# Altium PCB 400ETBV4.PcbDoc (part 1 of 2)
Units mm, origin at the board's own origin, x right, y up, seen from the top; angles counter-clockwise.
Board outline 52.77 x 58.36 mm, 2 copper layers (Top Layer, Bottom Layer), stack 1.651 mm thick; 65 components, 61 nets, 261 pads, 245 vias.
Unrouted connection lines stored in the file: 16.
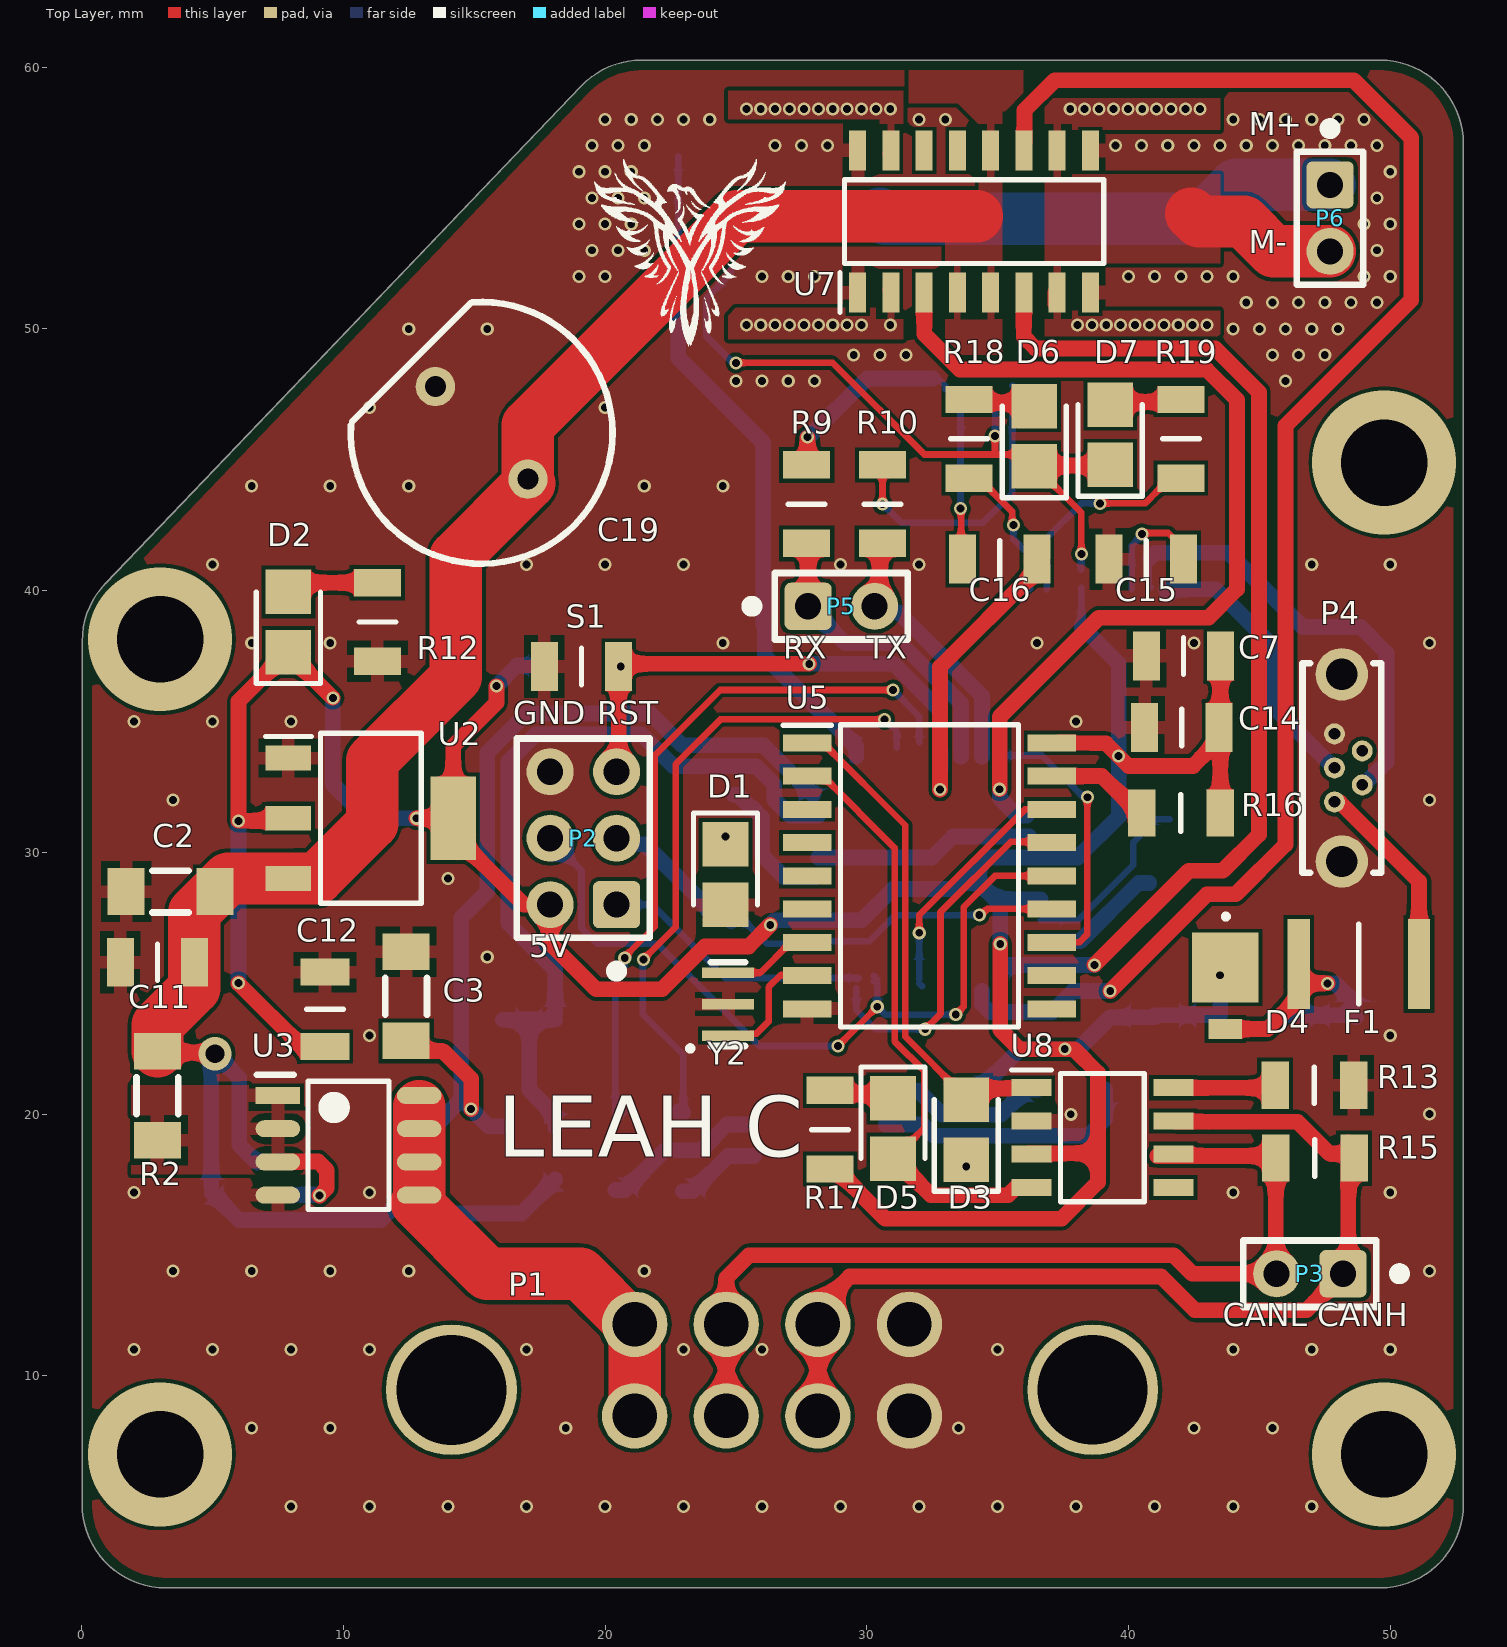
[diagram p0: Top Layer view]
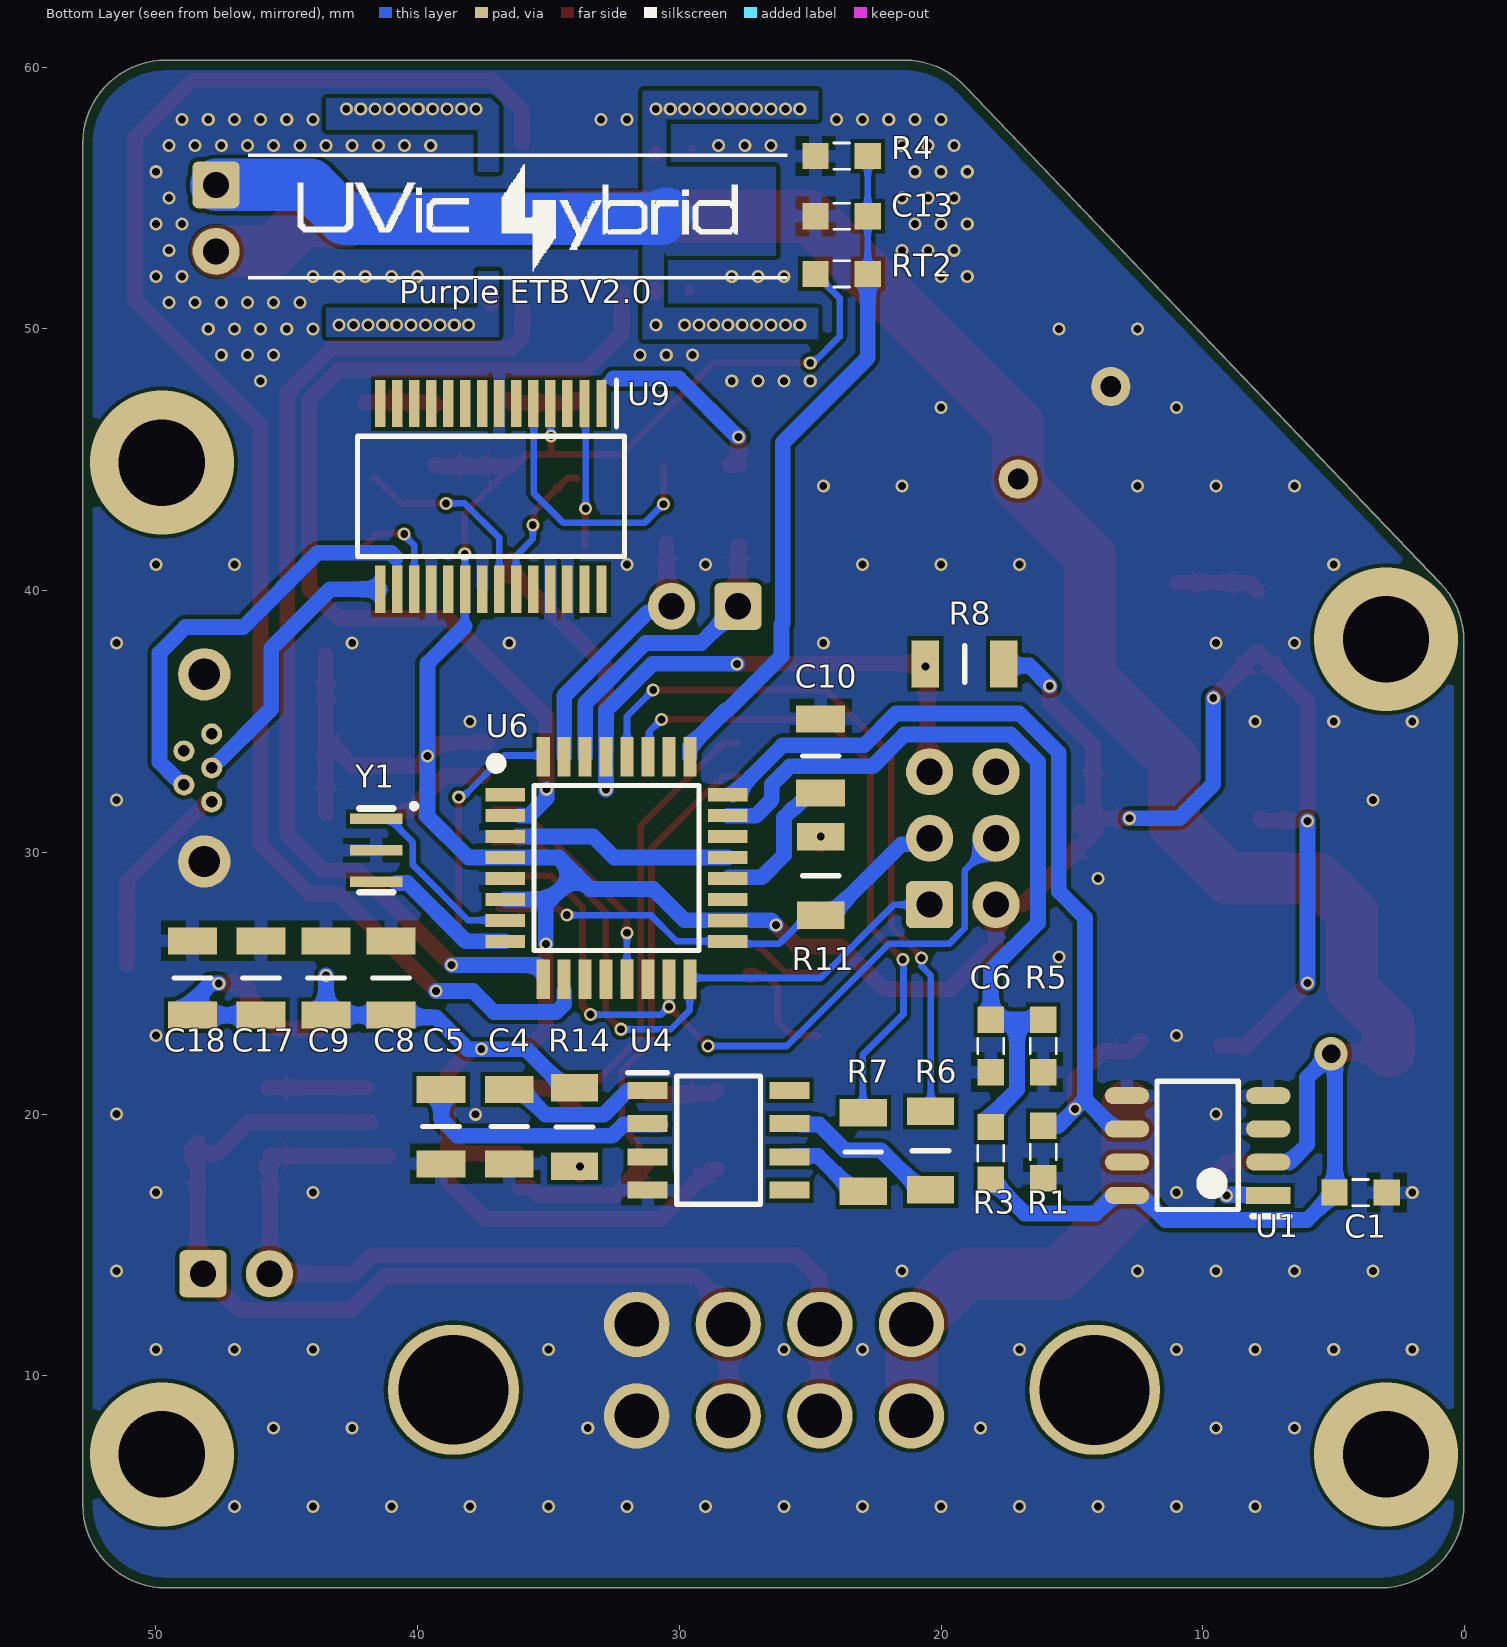
[diagram p1: Bottom Layer view, seen from below]

## Layer stack, top to bottom
Top Solder: solder mask 0.0102, Solder Resist, Dk 3.5
Top Layer: signal copper 0.0254
Dielectric 1: dielectric 1.6, FR-4, Dk 4.8
Bottom Layer: signal copper 0.0254
Bottom Solder: solder mask 0.0102, Solder Resist, Dk 3.5

## Board outline
3.205,1.9 cw(c3.205,5.08) 0.025,5.08 0.025,38.066 cw(c3.205,38.066) 0.907,40.264 19.093,59.281 cw(c21.391,57.083) 21.391,60.263 49.616,60.263 cw(c49.616,57.083) 52.796,57.083 52.796,5.08 cw(c49.616,5.08) 49.616,1.9
cut-out: 3.2,1.9

## Design rules (kind name [scope] priority, off if disabled: settings)
BoardOutlineClearance [All] p1: gap=0.381 ignorepadtopadclearanceinfootprint=FALSE except(0: Arc-SplitContinuation Track-SplitContinuation SMDPad-SplitContinuation THPad-SplitContinuation Via-SplitContinuation Fill-SplitContinuation Poly-SplitContinuation Region-SplitContinuation Text-SplitContinuation)
Clearance [All] p1: gap=0.15 ignorepadtopadclearanceinfootprint=FALSE
HoleSize [All] p1: absolutevalues=TRUE maxlimit=5 minlimit=0.3 maxpercent=80.000 minpercent=20.000
HoleToHoleClearance [All] p1: gap=0.2 allowstackedmicrovias=TRUE
MinimumAnnularRing [All] p1: minimumring=0.1
MinimumSolderMaskSliver [All] p1: minsoldermaskwidth=0.05
PolygonConnect PolygonConnect_2 [InNet('+12V')] p1: thpad.connectstyle=Relief thpad.reliefconductorwidth=0.254 thpad.reliefentries=4 thpad.polygonreliefangle="90 Angle" thpad.airgapwidth=0.254 smdpad.connectstyle=Relief smdpad.reliefconductorwidth=0.254 smdpad.reliefentries=4 smdpad.polygonreliefangle="90 Angle" smdpad.airgapwidth=0.254 via.connectstyle=Direct via.reliefconductorwidth=0.254 via.reliefentries=4 via.polygonreliefangle="90 Angle" via.airgapwidth=0.254
PolygonConnect PolygonConnect_4 [InNet('OUT_A')] p2: thpad.connectstyle=Relief thpad.reliefconductorwidth=0.254 thpad.reliefentries=4 thpad.polygonreliefangle="90 Angle" thpad.airgapwidth=0.254 smdpad.connectstyle=Relief smdpad.reliefconductorwidth=0.254 smdpad.reliefentries=4 smdpad.polygonreliefangle="90 Angle" smdpad.airgapwidth=0.254 via.connectstyle=Direct via.reliefconductorwidth=0.254 via.reliefentries=4 via.polygonreliefangle="90 Angle" via.airgapwidth=0.254
PolygonConnect PolygonConnect_3 [InNet('OUT_B')] p3: thpad.connectstyle=Relief thpad.reliefconductorwidth=0.254 thpad.reliefentries=4 thpad.polygonreliefangle="90 Angle" thpad.airgapwidth=0.254 smdpad.connectstyle=Relief smdpad.reliefconductorwidth=0.254 smdpad.reliefentries=4 smdpad.polygonreliefangle="90 Angle" smdpad.airgapwidth=0.254 via.connectstyle=Direct via.reliefconductorwidth=0.254 via.reliefentries=4 via.polygonreliefangle="90 Angle" via.airgapwidth=0.254
PolygonConnect [InNet('GND') And OnLayer('Multi-Layer')] p4: connectstyle=Direct reliefconductorwidth=0.5 reliefentries=4 polygonreliefangle="90 Angle" airgapwidth=0.254
PolygonConnect PolygonConnect_1 [All] p5: connectstyle=Relief reliefconductorwidth=0.5 reliefentries=4 polygonreliefangle="90 Angle" airgapwidth=0.254
RoutingVias [All] p1: holewidth=0.5 width=1 viastyle="Through Hole" minholewidth=0.5 minwidth=1 maxholewidth=0.5 maxwidth=1
SilkToSilkClearance [All] p1: silktosilkclearance=0.1
SolderMaskExpansion [All] p1: expansion=0.04
Width [All] p1: maxlimit=2 minlimit=0.254 preferedwidth=0.6
26 further rules are at their usual default settings.

## Classes and differential pairs
component class Candunio: C7 C8 C9 C10 C11 C12 C14 C15 C16 C17 C18 D1 D2 D3 D4 D5 D6 D7 F1 P2 P3 P4 P5 R8 R9 R10 R11 R12 R13 R14 R15 R16 R17 R18 R19 S1 U2 U5 U6 U8 U9 Y1 Y2
component class 400ETB: C1 C2 C3 C4 C5 C6 C13 C19 P1 P6 R1 R2 R3 R4 R5 R6 R7 RT2 U1 U3 U4 U7

## Components (designator, comment, footprint, x,y, rotation, side; value= is the part's Value field where it differs from the comment)
C1 "0.1uF" C0603 3.971,17 r0 bottom value=100pF
C2 "22uF" C1206 3.4,28.5 r0 top value=100pF
C3 "22uF" C1206 12.4,24.5 r270 top value=100pF
C4 "4.7uF" CAPC3216X170N 36.5,19.52 r90 bottom
C5 "4.7uF" CAPC3216X170N 39.1,19.52 r90 bottom
C6 "0.1uF" C0603 18.1,22.6 r90 bottom value=100pF
C7 "4.7uF" CAPC3216X170N 42.1,37.5 r0 top
C8 "4.7uF" CAPC3216X170N 41.016,25.2 r90 bottom
C9 "4.7uF" CAPC3216X170N 43.5,25.2 r270 bottom
C10 "4.7uF" CAPC3216X170N 24.6,33.68 r270 bottom
C11 "4.7uF" CAPC3216X170N 2.9,25.8 r0 top
C12 "4.7uF" CAPC3216X170N 9.3,24 r270 top
C13 "0.1uF" C0603 23.8,54.3 r180 bottom value=100pF
C14 "4.7uF" CAPC3216X170N 42.037,34.773 r0 top
C15 "4.7uF" CAPC3216X170N 40.68,41.2 r0 top
C16 "4.7uF" CAPC3216X170N 35.08,41.2 r0 top
C17 "4.7uF" CAPC3216X170N 45.984,25.2 r270 bottom
C18 "4.7uF" CAPC3216X170N 48.6,25.2 r270 bottom
C19 "470uF" "CAP THRU 10MM" 15.286,46.025 r135 top value=100pF
D1 "Red" LEDC3216X120NRED 24.6,29.15 r270 top
D2 "Green" LEDC3216X120NGRN 7.9,38.8 r90 top
D3 "Yellow" LEDC3216X120NYEL 33.8,19.4 r90 top
D4 "Diode" DO-220AA 43.7,24.901 r270 top
D5 "Yellow" LEDC3216X120NYEL 31,19.45 r270 top
D6 "Yellow" LEDC3216X120NYEL 36.4,45.9 r90 top
D7 "Yellow" LEDC3216X120NYEL 39.3,45.95 r90 top
F1 "Fuse 2" FUSC4632X85N 48.8,25.73 r0 top
P1 "Molex MX150 8P" "MX150 8-Pin" 14.131,9.465 r0 top locked
P2 "ICSP" "Pin Header 2x3 TH Pitch 2.54mm" 17.9,28 r90 top
P3 "CANOUT" "Pin Header 1x2 TH Pitch 2.54mm" 48.2,13.9 r180 top
P4 "USB_MICRO_B" "USB MICRO B THRU" 48.15,33.225 r90 top
P5 "CANOUT" "Pin Header 1x2 TH Pitch 2.54mm" 27.76,39.4 r0 top
P6 "CANOUT" "Pin Header 1x2 TH Pitch 2.54mm" 47.7,55.5 r270 top
R1 "3K3" R0603 16.1,18.55 r90 bottom value=1K
R2 "0R05" R1206 2.9,20.7 r90 top value=1K
R3 "10K0" R0603 18.1,18.5 r270 bottom value=1K
R4 "5K0" R0603 23.8,56.6 r180 bottom value=10K
R5 "3K3" R0603 16.1,22.6 r90 bottom value=1K
R6 "10K" RESC3216X60N 20.4,18.6 r90 bottom
R7 "10K" RESC3216X60N 22.975,18.55 r90 bottom
R8 "10K" RESC3216X60N 19.1,37.2 r0 bottom
R9 "10K" RESC3216X60N 27.7,43.3 r90 top
R10 "10K" RESC3216X60N 30.6,43.3 r90 top
R11 "10K" RESC3216X60N 24.6,29.1 r270 bottom
R12 "10K" RESC3216X60N 11.3,38.8 r270 top
R13 "10K" RESC3216X60N 47.1,21.1 r180 top
R14 "10K" RESC3216X60N 34,19.5 r270 bottom
R15 "10K" RESC3216X60N 47.117,18.313 r180 top
R16 "10K" RESC3216X60N 42,31.5 r0 top
R17 "10K" RESC3216X60N 28.6,19.4 r270 top
R18 "10K" RESC3216X60N 33.9,45.8 r90 top
R19 "10K" RESC3216X60N 42,45.8 r90 top
RT2 "NCP18XH103F03RB" R0603 23.8,52.1 r180 bottom
S1 "SW-PB" SMDswitch_1206 19.1,37.1 r180 top
U1 "MAX4172" SOIC-8 10.2,18.8 r0 bottom
U2 "LM1117IMPX-5.0" SOT230P700X180-4N 11.05,31.3 r0 top
U3 "DMG4435SSS" SOIC-8 10.2,18.8 r0 top
U4 "AS5601-ASOM" SOIC127P600X175-8N 28.5,19 r180 bottom locked
U5 "MCP2515-E/ST" SOIC127P1030X265-18N 32.4,29.1 r0 top
U6 "ATmega328P-AU" QFP80P900X900X120-32N 32.4,29.4 r180 bottom
U7 "VNH7070ASTR" SOIC127P600X175-16N 34.1,54.1 r90 top
U8 "MCP2551-E/SN" SOIC127P600X175-8N 39,19.1 r0 top
U9 "FT232RL-Reel" SOP65P780X200-28N 37.2,43.6 r270 bottom
Y1 "CSTCE16M0V53-R0" CSTCE_G 41.58,30.074 r90 bottom
Y2 "CSTCE16M0V53-R0" CSTCE_G 24.7,24.2 r270 top

## Footprints (in the part's own frame and the unit in brackets; to place one, negate y for a bottom-side part, rotate by r counter-clockwise, add the part's x,y. Pads: shape width x height; smd on the part's side, far side on the other; paste and mask are expansions set on the pad)
C0603 [mm]
  rect 1x1 smd: 1(-1,0) 2(1,0)
  silkscreen extent -0.3,-0.5 0.3,0.5, body extent -0.8,-0.4 0.8,0.4, height 0.4
C1206 [mm]
  rect 1.4x1.8 smd: 1(-1.7,0) 2(1.7,0)
  silkscreen extent -0.7,-0.8 0.7,0.8, body extent -1.5,-0.8 1.5,0.8, height 0.6
"CAP THRU 10MM" [mm]
  round 1.5 hole 0.8: 1(-2.5,0) 2(2.5,0)
  silkscreen extent -5,-5 3.8,5, body extent -5,-5 5,5.1, height 10
CAPC3216X170N [mm]
  rect 1.03x1.87 smd: 1(-1.42,0) 2(1.42,0)
  silkscreen extent 0,-0.7 0,0.7, body extent -1.6,-0.8 1.6,0.8, height 1.7
CSTCE_G [mm]
  rect 0.4x2 smd: 1(1.2,0) 2(0,0) 3(-1.2,0)
  silkscreen extent -1.6,-1.52 1.77,0.65, body extent -1.6,-0.65 1.6,0.65, height 0.7
DO-220AA [mil]
  rect 30x50 smd: 1(65.06,0)
  rect 105.12x100 smd: 2(-27.5,0)
  silkscreen extent -107,-2 -102,3, body extent -76,-40 76,40, height 39
FUSC4632X85N [mm]
  rect 0.85x3.43 smd: 1(-2.3,0) 2(2.3,0)
  silkscreen extent 0,-1.52 0,1.52, body extent -2.54,-3.2 2.54,1.65, height 0.54
LEDC3216X120NGRN [mm]
  rect 1.7x1.75 smd: 1(-1.15,0) 2(1.15,0)
  silkscreen extent -2.35,-1.22 1.15,1.22, body extent -1.6,-0.8 1.6,0.8, height 1.1
LEDC3216X120NRED [mm]
  rect 1.7x1.75 smd: 1(-1.15,0) 2(1.15,0)
  silkscreen extent -2.35,-1.22 1.15,1.22, body extent -1.6,-0.8 1.6,0.8, height 1.1
LEDC3216X120NYEL [mm]
  rect 1.7x1.75 smd: 1(-1.15,0) 2(1.15,0)
  silkscreen extent -2.35,-1.22 1.15,1.22, body extent -1.6,-0.8 1.6,0.8, height 1.1
"MX150 8-Pin" [mm]
  round 2.5 hole 1.7: 1(7,2.5) 2(10.5,2.5) 3(14,2.5) 4(17.5,2.5) 5(7,-1) 6(10.5,-1) 7(14,-1) 8(17.5,-1)
  round 5 hole 4.2 mask+0.102: 24(0,0) 24(24.5,0)
"Pin Header 1x2 TH Pitch 2.54mm" [mm]
  rrect25% 1.8x1.8 hole 1: 1(0,0)
  round 1.8 hole 1: 2(2.54,0)
  silkscreen extent -2.3,-1.27 3.81,1.27, body extent -1.27,-1.27 3.81,1.27, height 9.5
"Pin Header 2x3 TH Pitch 2.54mm" [mm]
  rrect25% 1.8x1.8 hole 1: 1(0,-2.54)
  round 1.8 hole 1: 2(2.54,-2.54) 3(5.08,-2.54) 4(0,0) 5(2.54,0) 6(5.08,0)
  silkscreen extent -2.69,-3.81 6.35,1.27, body extent -1.27,-3.81 6.35,1.27, height 9.5
QFP80P900X900X120-32N [mm]
  rect 1.5x0.5 smd: 1(-4.25,2.8) 2(-4.25,2) 3(-4.25,1.2) 4(-4.25,0.4) 5(-4.25,-0.4) 6(-4.25,-1.2) 7(-4.25,-2) 8(-4.25,-2.8) 17(4.25,-2.8) 18(4.25,-2) 19(4.25,-1.2) 20(4.25,-0.4) 21(4.25,0.4) 22(4.25,1.2) 23(4.25,2) 24(4.25,2.8)
  rect 0.5x1.5 smd: 9(-2.8,-4.25) 10(-2,-4.25) 11(-1.2,-4.25) 12(-0.4,-4.25) 13(0.4,-4.25) 14(1.2,-4.25) 15(2,-4.25) 16(2.8,-4.25) 25(2.8,4.25) 26(2,4.25) 27(1.2,4.25) 28(0.4,4.25) 29(-0.4,4.25) 30(-1.2,4.25) 31(-2,4.25) 32(-2.8,4.25)
  silkscreen extent -4.8,-3.15 3.15,4.2, body extent -4.5,-4.5 4.5,4.5, height 1.2
R0603 [mm]
  rect 1x1 smd: 1(-1,0) 2(1,0)
  silkscreen extent -0.3,-0.5 0.3,0.5, body extent -0.8,-0.4 0.8,0.4, height 0.4
R1206 [mm]
  rect 1.4x1.8 smd: 1(-1.7,0) 2(1.7,0)
  silkscreen extent -0.7,-0.8 0.7,0.8, body extent -1.5,-0.8 1.5,0.8, height 0.6
RESC3216X60N [mm]
  rect 1.05x1.8 smd: 1(-1.5,0) 2(1.5,0)
  silkscreen extent 0,-0.7 0,0.7, body extent -1.57,-0.83 1.58,0.77, height 1.2
SMDswitch_1206 [mm]
  rect 1.03x1.87 smd: 1(-1.42,0) 2(1.42,0)
  silkscreen extent 0,-0.7 0,0.7, body extent -1.53,-0.81 1.53,0.81, height 0.46
SOIC127P600X175-8N [mm]
  rect 1.525x0.65 smd: 1(-2.712,1.905) 2(-2.712,0.635) 3(-2.712,-0.635) 4(-2.712,-1.905) 5(2.712,-1.905) 6(2.712,-0.635) 7(2.712,0.635) 8(2.712,1.905)
  silkscreen extent -3.47,-2.45 1.6,2.58, body extent -3,-2.45 3,2.45, height 1.75
SOIC127P600X175-16N [mm]
  rect 1.525x0.65 smd: 1(-2.712,4.445) 2(-2.712,3.175) 3(-2.712,1.905) 4(-2.712,0.635) 5(-2.712,-0.635) 6(-2.712,-1.905) 7(-2.712,-3.175) 8(-2.712,-4.445) 9(2.712,-4.445) 10(2.712,-3.175) 11(2.712,-1.905) 12(2.712,-0.635) 13(2.712,0.635) 14(2.712,1.905) 15(2.712,3.175) 16(2.712,4.445)
  silkscreen extent -3.47,-4.95 1.6,5.12, body extent -3,-4.95 3,4.95, height 1.75
SOIC127P1030X265-18N [mm]
  rect 1.85x0.65 smd: 1(-4.675,5.08) 2(-4.675,3.81) 3(-4.675,2.54) 4(-4.675,1.27) 5(-4.675,0) 6(-4.675,-1.27) 7(-4.675,-2.54) 8(-4.675,-3.81) 9(-4.675,-5.08) 10(4.675,-5.08) 11(4.675,-3.81) 12(4.675,-2.54) 13(4.675,-1.27) 14(4.675,0) 15(4.675,1.27) 16(4.675,2.54) 17(4.675,3.81) 18(4.675,5.08)
  silkscreen extent -5.6,-5.77 3.4,5.77, body extent -5.15,-5.77 5.15,5.78, height 2.65
SOIC-8 [mm] "SOIC, 8-Leads, Body 4.90x3.90mm, Pitch 1.27mm, IPC Low Density"
  rect 1.7x0.65 smd: 1(-2.7,1.91)
  oval 1.7x0.65 smd: 2(-2.7,0.64) 3(-2.7,-0.63) 4(-2.7,-1.9) 5(2.7,-1.9) 6(2.7,-0.63) 7(2.7,0.64) 8(2.7,1.91)
  silkscreen extent -3.5,-2.45 1.55,2.7, body extent -1.95,-2.45 1.95,2.45, height 1.75
SOP65P780X200-28N [mm]
  rect 1.8x0.4 smd: 1(-3.55,4.225) 2(-3.55,3.575) 3(-3.55,2.925) 4(-3.55,2.275) 5(-3.55,1.625) 6(-3.55,0.975) 7(-3.55,0.325) 8(-3.55,-0.325) 9(-3.55,-0.975) 10(-3.55,-1.625) 11(-3.55,-2.275) 12(-3.55,-2.925) 13(-3.55,-3.575) 14(-3.55,-4.225) 15(3.55,-4.225) 16(3.55,-3.575) 17(3.55,-2.925) 18(3.55,-2.275) 19(3.55,-1.625) 20(3.55,-0.975) 21(3.55,-0.325) 22(3.55,0.325) 23(3.55,0.975) 24(3.55,1.625) 25(3.55,2.275) 26(3.55,2.925) 27(3.55,3.575) 28(3.55,4.225)
  silkscreen extent -4.45,-5.1 2.3,5.1, body extent -3.9,-5.1 3.9,5.1, height 2
SOT230P700X180-4N [mm]
  rect 1.75x0.95 smd: 1(-3.15,2.3) 2(-3.15,0) 3(-3.15,-2.3)
  rect 1.75x3.2 smd: 4(3.15,0)
  silkscreen extent -4.03,-3.25 1.92,3.25, body extent -3.64,-3.35 3.65,3.35, height 1.81
"USB MICRO B THRU" [mm]
  round 0.8 hole 0.44: 1(-1.3,0.28) 2(-0.65,-0.78) 3(0,0.28) 4(0.65,-0.78) 5(1.3,0.28)
  round 2 hole 1.2: 5(-3.575,0) 5(3.575,0)
  silkscreen extent -4,-1.5 4,1.5, body extent -4,-1.5 4,1.5, height 5.61

## Part data
C1 C2 C3 C6 C13: library part Cap, "Capacitor", LatestRevisionDate=17-Jul-2002, LatestRevisionNote="Re-released for DXP Platform.", PackageDescription="Radial Cap, Thru-Hole; 2 Leads; 0.3 in Pin Spacing", PackageReference=RAD-0.3, Published=8-Jun-2000, Publisher="Altium Limited"
C4 C5 C7 C8 C9 C10 C11 C12 C14 C15 C16 C17 C18: library part "Cap Semi", "Capacitor (Semiconductor SIM Model)", Capacitance=1uF, Case/Package=1206, Case Code (Metric)=3216, Dielectric=X7R, Manufacturer=Murata, Manufacturer Part Number=GRM31MR71H105KA88L, Max Operating Temperature=125°C, Min Operating Temperature=-55°C, Package Quantity=1, Supplier Part Number=1276-1055-1-ND, Tolerance=10%, Voltage=50V, Case Code (Imperial)=1206, ComponentLink1Description=https://datasheet.ciiva.com/16379/product-16379616.pdf, ComponentLink1URL=https://datasheet.ciiva.com/16379/product-16379616.pdf, ComponentLink2Description=https://datasheet.ciiva.com/14116/nmgrm-data-en-14116709.pdf, ComponentLink2URL=https://datasheet.ciiva.com/14116/nmgrm-data-en-14116709.pdf, ComponentLink3Description=https://datasheet.ciiva.com/22703/608985-22703384.pdf, ComponentLink3URL=https://datasheet.ciiva.com/22703/608985-22703384.pdf, ComponentLink4Description=https://datasheet.ciiva.com/3777/42grm31mr71h105ka8823-3777081.pdf, ComponentLink4URL=https://datasheet.ciiva.com/3777/42grm31mr71h105ka8823-3777081.pdf, ComponentLink5Description=https://datasheet.ciiva.com/6270/partnumbering-e-01-6270398.pdf, ComponentLink5URL=https://datasheet.ciiva.com/6270/partnumbering-e-01-6270398.pdf, ComponentLink6Description=https://datasheet.ciiva.com/6270/partnumbering-e-01-6270399.pdf, ComponentLink6URL=https://datasheet.ciiva.com/6270/partnumbering-e-01-6270399.pdf, ComponentLink7Description=https://datasheet.ciiva.com/29199/455056-da-01-en-vs-kondensator-1206-29199449.pdf, ComponentLink7URL=https://datasheet.ciiva.com/29199/455056-da-01-en-vs-kondensator-1206-29199449.pdf, ComponentLink8Description=https://datasheet.ciiva.com/29202/450923-da-01-de-vs-chip-kond-1206-1-0-uf-10pr-50-0v-x7r-29202718.pdf, ComponentLink8URL=https://datasheet.ciiva.com/29202/450923-da-01-de-vs-chip-kond-1206-1-0-uf-10pr-50-0v-x7r-29202718.pdf, Depth=1.6mm, Height=1.15mm, LatestRevisionDate=29-May-2009, LatestRevisionNote="IPC-7351 Footprint Added.", Lead Free="Lead Free", Length=3.2mm, Material=Ceramic, Mount="Surface Mount", Number of Pins=2, PackageDescription="Chip Capacitor", PackageReference=C1206, Packaging="Tape and Reel", Published=8-Jun-2000, Publisher="Altium Limited", REACH SVHC="No SVHC", Stock 1=0, Supplier 1=Digi-Key, Supplier 2=Digi-Key, Termination=SMD/SMT, Thickness=0.049inch, Voltage Rating=50V, Voltage Rating (DC)=50V, Width=0.063inch
C19: library part Cap2, "Capacitor", PackageDescription="Capacitor; 2 Leads", PackageReference=CAPR5-4X5, Published=23-Sep-2002, Publisher="Altium Limited"
D1: library part LED2_2, "Typical RED, GREEN, YELLOW, AMBER GaAs LED", Case/Package=1206, Case Code (Metric)=3216, Colour=Yellow, Forward Current=20mA, Forward Voltage=2.1V, Lens Colour=White,Clear, Manufacturer="Broadcom Avago", Manufacturer Part Number=HSMY-C150, Max Operating Temperature=85°C, Max Power Dissipation=65mW, Min Operating Temperature=-40°C, Package Quantity=1, Reverse Voltage=5V, Supplier Part Number=732-4992-1-ND, Case Code (Imperial)=1206, ComponentLink1Description=https://datasheet.ciiva.com/15117/getdatasheetpartid-110528-15117488.pdf, ComponentLink1URL=https://datasheet.ciiva.com/15117/getdatasheetpartid-110528-15117488.pdf, ComponentLink2Description=https://datasheet.ciiva.com/11774/0900766b804a6539-11774578.pdf, ComponentLink2URL=https://datasheet.ciiva.com/11774/0900766b804a6539-11774578.pdf, ComponentLink3Description=https://datasheet.ciiva.com/19466/1557071-19466435.pdf, ComponentLink3URL=https://datasheet.ciiva.com/19466/1557071-19466435.pdf, ComponentLink4Description=https://datasheet.ciiva.com/14172/swseriehsmx-c150toc190-e-14172159.pdf, ComponentLink4URL=https://datasheet.ciiva.com/14172/swseriehsmx-c150toc190-e-14172159.pdf, ComponentLink5Description=https://datasheet.ciiva.com/29280/180507-da-01-en-chip-led-hsmy-c150-gelb-29280997.pdf, ComponentLink5URL=https://datasheet.ciiva.com/29280/180507-da-01-en-chip-led-hsmy-c150-gelb-29280997.pdf, ComponentLink6Description=https://datasheet.ciiva.com/11773/0900766b804a6539-11773956.pdf, ComponentLink6URL=https://datasheet.ciiva.com/11773/0900766b804a6539-11773956.pdf, ComponentLink7Description=https://datasheet.ciiva.com/15117/getdatasheetpartid-142358-15117749.pdf, ComponentLink7URL=https://datasheet.ciiva.com/15117/getdatasheetpartid-142358-15117749.pdf, ComponentLink8Description=https://datasheet.ciiva.com/46426/313031-46426533.pdf, ComponentLink8URL=https://datasheet.ciiva.com/46426/313031-46426533.pdf, ComponentLink9Description=https://datasheet.ciiva.com/14172/swseriehsmx-c150toc190-e-14172156.pdf, ComponentLink9URL=https://datasheet.ciiva.com/14172/swseriehsmx-c150toc190-e-14172156.pdf, ComponentLink10Description=https://datasheet.ciiva.com/29281/180509-da-01-en-chip-led-hsmh-c150-rot-29281009.pdf, ComponentLink10URL=https://datasheet.ciiva.com/29281/180509-da-01-en-chip-led-hsmh-c150-rot-29281009.pdf, Contact Plating=Gold, Depth=1.6mm, Dominant Wavelength=586nm, Height=1.1mm, Illumination Colour=Yellow, LatestRevisionDate=17-Jul-2002, LatestRevisionNote="Re-released for DXP Platform.", Lead Free="Lead Free", Length=3.2mm, Lens Style=Diffused,Colorless,Rectangular, Lens Transparency=Diffused, Luminous Intensity=8mcd, Mount="Surface Mount", Number of Elements=1, Number of LEDs=1, Number of Pins=2, PackageDescription="SM LED; 2 Flat Leads", PackageReference=3.2X1.6X1.1, PackageVersion=Feb-2002, Packaging="Tape and Reel", Power Dissipation=65mW, Power Rating=65mW, Published=8-Jun-2000, Publisher="Altium Limited", Radiation Hardening=No, REACH SVHC="No SVHC", Stock 1=0, Stock 2=0, Supplier 1=Digi-Key, Supplier 2=Digi-Key, Supplier 3=Digi-Key, Supplier 4=Digi-Key, Test Current=20mA, Viewing Angle=170°, Voltage Rating (DC)=2.1V, Wavelength=586nm, Width=1.6mm
D2: library part LED2, "Typical RED, GREEN, YELLOW, AMBER GaAs LED", Case/Package=1206, Case Code (Metric)=3216, Colour=Green,Yellow, Forward Current=20mA, Forward Voltage=2.2V, Lens Colour=White,Clear, Manufacturer="Broadcom Avago", Manufacturer Part Number=HSMG-C150, Max Operating Temperature=85°C, Max Power Dissipation=65mW, Min Operating Temperature=-30°C, Package Quantity=1, Reverse Voltage=5V, Supplier Part Number=732-4993-1-ND, Case Code (Imperial)=1206, ComponentLink1Description=https://datasheet.ciiva.com/11774/0900766b804a6539-11774272.pdf, ComponentLink1URL=https://datasheet.ciiva.com/11774/0900766b804a6539-11774272.pdf, ComponentLink2Description=https://datasheet.ciiva.com/14172/swseriehsmx-c150toc190-e-14172162.pdf, ComponentLink2URL=https://datasheet.ciiva.com/14172/swseriehsmx-c150toc190-e-14172162.pdf, ComponentLink3Description=https://datasheet.ciiva.com/46426/313031-46426517.pdf, ComponentLink3URL=https://datasheet.ciiva.com/46426/313031-46426517.pdf, ComponentLink4Description=https://datasheet.ciiva.com/15117/getdatasheetpartid-110366-15117482.pdf, ComponentLink4URL=https://datasheet.ciiva.com/15117/getdatasheetpartid-110366-15117482.pdf, ComponentLink5Description=https://datasheet.ciiva.com/19466/1556369-19466015.pdf, ComponentLink5URL=https://datasheet.ciiva.com/19466/1556369-19466015.pdf, ComponentLink6Description=https://datasheet.ciiva.com/29280/180668-da-01-en-chip-led-hsmg-c150-gelb-gruen-29280632.pdf, ComponentLink6URL=https://datasheet.ciiva.com/29280/180668-da-01-en-chip-led-hsmg-c150-gelb-gruen-29280632.pdf, Contact Plating=Gold, Depth=1.6mm, Dominant Wavelength=572nm, Height=1.1mm, Illumination Colour=Green, LatestRevisionDate=17-Jul-2002, LatestRevisionNote="Re-released for DXP Platform.", Length=3.2mm, Lens Style=Diffused,Colorless,Rectangular, Lens Transparency=Diffused, Luminous Intensity=15mcd, Mount="Surface Mount", Number of Elements=1, Number of LEDs=1, Number of Pins=2, PackageDescription="SM LED; 2 Flat Leads", PackageReference=3.2X1.6X1.1, PackageVersion=Feb-2002, Packaging="Tape and Reel", Power Dissipation=65mW, Power Rating=65mW, Published=8-Jun-2000, Publisher="Altium Limited", Radiation Hardening=No, REACH SVHC="No SVHC", Supplier 1=Digi-Key, Supplier 2=Digi-Key, Test Current=20mA, Viewing Angle=170°, Wavelength=572nm, Width=1.6mm
D3 D5 D6 D7: library part LED2_1, "Typical RED, GREEN, YELLOW, AMBER GaAs LED", Case/Package=1206, Case Code (Metric)=3216, Forward Current=20mA, Forward Voltage=2.1V, Lens Colour=White,Clear, Manufacturer="Broadcom Avago", Manufacturer Part Number=HSMY-C150, Max Operating Temperature=85°C, Max Power Dissipation=65mW, Min Operating Temperature=-40°C, Package Quantity=1, Reverse Voltage=5V, Supplier Part Number=732-4994-1-ND, Case Code (Imperial)=1206, Colour=Yellow, ComponentLink1Description=https://datasheet.ciiva.com/15117/getdatasheetpartid-110528-15117488.pdf, ComponentLink1URL=https://datasheet.ciiva.com/15117/getdatasheetpartid-110528-15117488.pdf, ComponentLink2Description=https://datasheet.ciiva.com/11774/0900766b804a6539-11774578.pdf, ComponentLink2URL=https://datasheet.ciiva.com/11774/0900766b804a6539-11774578.pdf, ComponentLink3Description=https://datasheet.ciiva.com/19466/1557071-19466435.pdf, ComponentLink3URL=https://datasheet.ciiva.com/19466/1557071-19466435.pdf, ComponentLink4Description=https://datasheet.ciiva.com/14172/swseriehsmx-c150toc190-e-14172159.pdf, ComponentLink4URL=https://datasheet.ciiva.com/14172/swseriehsmx-c150toc190-e-14172159.pdf, ComponentLink5Description=https://datasheet.ciiva.com/29280/180507-da-01-en-chip-led-hsmy-c150-gelb-29280997.pdf, ComponentLink5URL=https://datasheet.ciiva.com/29280/180507-da-01-en-chip-led-hsmy-c150-gelb-29280997.pdf, Contact Plating=Gold, Depth=1.6mm, Dominant Wavelength=586nm, Height=1.1mm, Illumination Colour=Yellow, LatestRevisionDate=17-Jul-2002, LatestRevisionNote="Re-released for DXP Platform.", Lead Free="Lead Free", Length=3.2mm, Lens Style=Diffused,Colorless,Rectangular, Lens Transparency=Diffused, Luminous Intensity=8mcd, Mount="Surface Mount", Number of Elements=1, Number of LEDs=1, Number of Pins=2, PackageDescription="SM LED; 2 Flat Leads", PackageReference=3.2X1.6X1.1, PackageVersion=Feb-2002, Packaging="Tape and Reel", Power Dissipation=65mW, Power Rating=65mW, Published=8-Jun-2000, Publisher="Altium Limited", Radiation Hardening=No, REACH SVHC="No SVHC", Stock 1=0, Supplier 1=Digi-Key, Supplier 2=Digi-Key, Test Current=20mA, Viewing Angle=170°, Voltage Rating (DC)=2.1V, Wavelength=586nm, Width=1.6mm
D4: "Default Diode", Supplier Part Number=SS1P3L-M3/84AGICT-ND, Code_JEDEC=DO-214-AB, LatestRevisionDate=17-Jul-2002, LatestRevisionNote="Re-released for DXP Platform.", PackageDescription="DO-214-AB/SMC; 2 C-Bend Leads; Body 7.9 x 5.9 mm, inc. leads (LxW)", PackageReference=SMC, PackageVersion=Sep-1996, Published=8-Jun-2000, Publisher="Altium Limited", Supplier 1=Digi-Key, Supplier 2=Digi-Key
F1: "Fuse", Case/Package=1812, Case Code (Metric)=4532, Current Rating=100A, Hold Current=500mA, Manufacturer=Bourns, Manufacturer Part Number=MF-MSMF050-2, Max Operating Temperature=85°C, Min Operating Temperature=-40°C, Operating Supply Voltage=15V, Package Quantity=2000, Power Dissipation=800mW, Resistance=150mR, Supplier Part Number=?MF-MSMF050-2CT-ND, Trip Current=1A, Approvals=UL,CSA,TUV, Case Code (Imperial)=1812, ComponentLink1Description=https://datasheet.ciiva.com/326/mfmsmf-326354.pdf, ComponentLink1URL=https://datasheet.ciiva.com/326/mfmsmf-326354.pdf, ComponentLink2Description=https://datasheet.ciiva.com/1228/1786007-1228155.pdf, ComponentLink2URL=https://datasheet.ciiva.com/1228/1786007-1228155.pdf, ComponentLink3Description=https://datasheet.ciiva.com/16205/mfmsmf-16205994.pdf, ComponentLink3URL=https://datasheet.ciiva.com/16205/mfmsmf-16205994.pdf, ComponentLink4Description=https://datasheet.ciiva.com/34302/1164200-34302041.pdf, ComponentLink4URL=https://datasheet.ciiva.com/34302/1164200-34302041.pdf, ComponentLink5Description=https://datasheet.ciiva.com/14537/70153434-14537737.pdf, ComponentLink5URL=https://datasheet.ciiva.com/14537/70153434-14537737.pdf, ComponentLink6Description=https://datasheet.ciiva.com/46395/1695373-46395287.pdf, ComponentLink6URL=https://datasheet.ciiva.com/46395/1695373-46395287.pdf, ComponentLink7Description=https://datasheet.ciiva.com/22749/1695373-22749079.pdf, ComponentLink7URL=https://datasheet.ciiva.com/22749/1695373-22749079.pdf, ComponentLink8Description=https://datasheet.ciiva.com/32426/mf-msmf-series-eng-tds-32426126.pdf, ComponentLink8URL=https://datasheet.ciiva.com/32426/mf-msmf-series-eng-tds-32426126.pdf, ComponentLink9Description=https://datasheet.ciiva.com/4501/mfmsmf-72300-4501655.pdf, ComponentLink9URL=https://datasheet.ciiva.com/4501/mfmsmf-72300-4501655.pdf, ComponentLink10Description=https://datasheet.ciiva.com/3019/mfmsmf-3019622.pdf, ComponentLink10URL=https://datasheet.ciiva.com/3019/mfmsmf-3019622.pdf, ComponentLink11Description=https://datasheet.ciiva.com/3019/mfmsmf-3019621.pdf, ComponentLink11URL=https://datasheet.ciiva.com/3019/mfmsmf-3019621.pdf, ComponentLink12Description=https://datasheet.ciiva.com/326/mfmsmf-326356.pdf, ComponentLink12URL=https://datasheet.ciiva.com/326/mfmsmf-326356.pdf, ComponentLink13Description=https://datasheet.ciiva.com/1274/1786007-1274499.pdf, ComponentLink13URL=https://datasheet.ciiva.com/1274/1786007-1274499.pdf, ComponentLink14Description=https://datasheet.ciiva.com/326/mfmsmf-326355.pdf, ComponentLink14URL=https://datasheet.ciiva.com/326/mfmsmf-326355.pdf, ComponentLink15Description=https://datasheet.ciiva.com/1274/1786007-1274498.pdf, ComponentLink15URL=https://datasheet.ciiva.com/1274/1786007-1274498.pdf, ComponentLink16Description=https://datasheet.ciiva.com/15226/getdatasheetpartid-117168-15226886.pdf, ComponentLink16URL=https://datasheet.ciiva.com/15226/getdatasheetpartid-117168-15226886.pdf, ComponentLink17Description=https://datasheet.ciiva.com/25894/mfmsmf-25894175.pdf, ComponentLink17URL=https://datasheet.ciiva.com/25894/mfmsmf-25894175.pdf, Contact Plating=Gold, Height=0.85mm, LatestRevisionDate=17-Jul-2002, LatestRevisionNote="Re-released for DXP Platform.", Lead Free="Lead Free", Length=4.73mm, Max Current Rating=100A, Mount="Surface Mount,PCB", Number of Terminals=2, PackageDescription="Thru-Hole; 2 Leads", PackageReference=PIN-W2/E2.8, Packaging="Tape and Reel", Part number=MF-MSMF050-2, Pricing 1="2000=0.2898, 4000=0.28463, 6000=0.27945, 10000=0.2691 (USD)", Published=8-Jun-2000, Publisher="Altium Limited", Radiation Hardening=No, REACH SVHC="No SVHC", Stock 1=126000, Supplier 1=Digi-Key, Terminal Material=Gold, Termination=SMD/SMT, Time to Trip=0.15s, Voltage Rating=15V, Voltage Rating (DC)=15V, Width=3.41mm
P2: library part "Header 3X2A", "Header, 3-Pin, Dual row", LatestRevisionDate=17-Jul-2002, LatestRevisionNote="Re-released for DXP Platform.", Publisher="Altium Limited"
P3 P5 P6: library part "Header 2", "Header, 2-Pin", LatestRevisionDate=17-Jul-2002, LatestRevisionNote="Re-released for DXP Platform.", Publisher="Altium Limited"
R1 R3 R4 R5: library part Res1, "Resistor", LatestRevisionDate=17-Jul-2002, LatestRevisionNote="Re-released for DXP Platform.", PackageDescription="Axial Device, Thru-Hole; 2 Leads; 0.3 in Pin Spacing", PackageReference=AXIAL-0.3, Published=8-Jun-2000, Publisher="Altium Limited"
R2: library part Res1, "Resistor", Power=1W, LatestRevisionDate=17-Jul-2002, LatestRevisionNote="Re-released for DXP Platform.", PackageDescription="Axial Device, Thru-Hole; 2 Leads; 0.3 in Pin Spacing", PackageReference=AXIAL-0.3, Published=8-Jun-2000, Publisher="Altium Limited"
R6 R7 R8 R9 R10 R11 R12 R13 R14 R15 R16 R17 R18 R19: library part Res1, "Resistor", Case/Package=1206, Case Code (Metric)=3216, Manufacturer="Stackpole Electronics", Manufacturer Part Number=RNCP1206FTD1K00, Max Operating Temperature=155°C, Max Power Dissipation=500mW, Min Operating Temperature=-55°C, Resistance=10kR, Supplier Part Number=RNCP1206FTD10K0CT-ND, Temperature Coefficient=100ppm/°C, Tolerance=1%, Case Code (Imperial)=1206, ComponentLink1Description=http://www.seielect.com/Catalog/SEI-rncp.pdf, ComponentLink1URL=http://www.seielect.com/Catalog/SEI-rncp.pdf, ComponentLink2Description=https://www.seielect.com/catalog/SEI-Packaging.pdf, ComponentLink2URL=https://www.seielect.com/catalog/SEI-Packaging.pdf, Composition="Thin Film", Contact Plating=Nickel,Tin,Matte, Height=0.024inch, Lead Free="Lead Free", Length=0.122inch, Mount="Surface Mount", Number of Terminations=2, Packaging="Tape and Reel", Pricing 1="1=0.1, 10=0.052, 100=0.0211, 1000=0.00949, 2500=0.00824 (USD)", Radiation Hardening=No, Stock 1=679, Supplier 1=Digi-Key, Width=0.059inch
RT2: library part "Res Thermal", "Thermistor", Code_IPC=RESC2012, LatestRevisionDate=29-May-2009, LatestRevisionNote="IPC-7351 Footprint Added.", PackageDescription="Chip Resistor 0805 Case Size", PackageReference=6-0805, PackageVersion=Mar-2003, Published=24-Mar-1999, Publisher="Altium Limited"
S1: "Switch", Manufacturer="ITT C&K", Manufacturer Part Number=KXT331LHS, Supplier Part Number=CKN10779CT-ND, ComponentLink1Description=https://www.ckswitches.com/media/1465/kxt3.pdf, ComponentLink1URL=https://www.ckswitches.com/media/1465/kxt3.pdf, ComponentLink2Description=http://www.ckswitches.com/media/1465/kxt3.pdf, ComponentLink2URL=http://www.ckswitches.com/media/1465/kxt3.pdf, LatestRevisionDate=17-Jul-2002, LatestRevisionNote="Re-released for DXP Platform.", PackageDescription="Switch; 2 Leads", PackageReference=SPST-2, Pricing 1="8500=0.1264 (USD)", Published=24-Mar-1999, Publisher="Altium Limited", Stock 1=42500, Supplier 1=Digi-Key
U1 U3: "SOIC"
U2: "800mA Low-Dropout Linear Regulator, 4-pin SOT-223", Manufacturer="National Semiconductor", PackageTopMarking=XYTT*N06B, PartNumber=LM1117IMPX-5.0/NOPBCT-ND, PowerWise=N, Supplier Part Number=296-21114-1-ND, Code_IPC=SOT223-4, Code_JEDEC=TO-261-AA, ComponentLink1Description="LM1117 Datasheet", ComponentLink1URL=http://www.national.com/ds/LM/LM1117.pdf, ComponentLink2Description="LM1117 Web Page", ComponentLink2URL=http://www.national.com/pf/LM/LM1117.html, ComponentLink3Description="MP04A Package Page", ComponentLink3URL=http://www.national.com/packaging/folders/mp04a.html, CompType="LDO IC", DatasheetVersion=Apr-2006, PackageDescription="Molded SOT-223, 6.50 x 3.56 x 1.6mm Body, 4 Lead, 2.3mm Pitch", PackageReference=MP04A, PackageVersion="revB, Apr-2003", PinCount=4, Published=1-Mar-2010, Publisher="Altium Limited", RoHS=N, Supplier 1=Digi-Key
U4: "Integrated Circuit", Manufacturer_Name=ams, Mouser Part Number=985-AS5601-ASOM, RS Part Number=1024168P, Datasheet Link=http://ams.com/eng/content/download/659003/1738497/343455.pdf, Height=1.75mm, Manufacturer_Part_Number=AS5601-ASOM, Mouser Price/Stock=https://www.mouser.com/Search/Refine.aspx?Keyword=985-AS5601-ASOM, RS Price/Stock=http://uk.rs-online.com/web/p/products/1024168P
U5: "SOIC", Supplier Part Number=MCP2515T-I/SOCT-ND, Supplier 1=Digi-Key
U6: "8-bit AVR Microcontroller, 32KB Flash, 1KB EEPROM, 2KB SRAM, 32-pin TQFP, Industrial Grade (-40°C to 85°C)", Supplier Part Number=ATMEGA328P-AU-ND, Code_JEDEC=MS-026-ABA, ComponentLink1Description="Manufacturer Link", ComponentLink1URL=http://www.atmel.com/products/avr/default.asp?, ComponentLink2Description="ATmega48A/48PA/88A/88PA/168A/168PA/328/328P Datasheet", ComponentLink2URL=http://www.atmel.com/dyn/resources/prod_documents/8271.pdf, ComponentLink3Description="ATmega48A/48PA/88A/88PA/168A/168PA/328/328P Summary", ComponentLink3URL=http://www.atmel.com/dyn/resources/prod_documents/8271S.pdf, ComponentLink4Description="Atmel.com Home", ComponentLink4URL=http://www.atmel.com, DatasheetVersion="revA, Jan-2010", PackageDescription="32-Lead, 7x7x1.0 mm Body, 0.8mm Lead Pitch, Thin Profile Plastic Quad Flat Package (TQFP)", PackageReference=32A, PackageVersion="revB, Oct-2001", Published=1-Apr-2010, Publisher="Altium Limited", Supplier 1=Digi-Key, Supplier 2=Farnell, Supplier 3=Mouser, Supplier Part Number 2=1715486, Supplier Part Number 3=556-ATMEGA328P-AU
U7: "Integrated Circuit", Manufacturer_Name=STMicroelectronics, Mouser Part Number=511-VNH7070ASTR, RS Part Number=1647017P, Datasheet Link=http://www.st.com/content/ccc/resource/technical/document/datasheet/08/97/0a/0c/cf/4b/41/40/DM00213876.pdf/files/DM00213876.pdf/jcr:content/translations/en.DM00213876.pdf, Height=1.75mm, Manufacturer_Part_Number=VNH7070ASTR, Mouser Price/Stock=https://www.mouser.com/Search/Refine.aspx?Keyword=511-VNH7070ASTR, RS Price/Stock=http://uk.rs-online.com/web/p/products/1647017P
U8: "SOIC", Supplier Part Number=MCP2551T-E/SNCT-ND, Supplier 1=Digi-Key
U9: "USB UART Asynchronous Serial Data Transfer Chip, SSOP-28, Tape and Reel", Case/Package=SSOP, Manufacturer=FTDI, Manufacturer Part Number=FT232RL-REEL, Max Operating Temperature=85°C, Max Supply Voltage=5.25V, Min Operating Temperature=-40°C, Min Supply Voltage=3.3V, Operating Supply Current=15mA, Package Quantity=2000, Supplier Part Number=768-1007-1-ND, Voltage=5V, ComponentLink1Description="Manufacturer Link", ComponentLink1URL=http://www.ftdichip.com/Products/ICs/FT232R.htm, ComponentLink2Description=Datasheet, ComponentLink2URL=http://www.ftdichip.com/Support/Documents/DataSheets/ICs/DS_FT232R.pdf, ComponentLink3Description=https://datasheet.ciiva.com/34304/2161019-34304054.pdf, ComponentLink3URL=https://datasheet.ciiva.com/34304/2161019-34304054.pdf, ComponentLink4Description=https://datasheet.ciiva.com/1787/ds-ft232r-1787047.pdf, ComponentLink4URL=https://datasheet.ciiva.com/1787/ds-ft232r-1787047.pdf, ComponentLink5Description=https://datasheet.ciiva.com/1787/ds-ft232r-1787048.pdf, ComponentLink5URL=https://datasheet.ciiva.com/1787/ds-ft232r-1787048.pdf, ComponentLink6Description=https://datasheet.ciiva.com/1787/ds-ft232r-1787049.pdf, ComponentLink6URL=https://datasheet.ciiva.com/1787/ds-ft232r-1787049.pdf, ComponentLink7Description=https://datasheet.ciiva.com/4787/ds-ft232r-11534-4787658.pdf, ComponentLink7URL=https://datasheet.ciiva.com/4787/ds-ft232r-11534-4787658.pdf, ComponentLink8Description=https://datasheet.ciiva.com/15150/getdatasheetpartid-643207-15150506.pdf, ComponentLink8URL=https://datasheet.ciiva.com/15150/getdatasheetpartid-643207-15150506.pdf, ComponentLink9Description=https://datasheet.ciiva.com/16200/ds-ft232r-16200652.pdf, ComponentLink9URL=https://datasheet.ciiva.com/16200/ds-ft232r-16200652.pdf, ComponentLink10Description=https://datasheet.ciiva.com/26841/ft232rl-reel-26841080.pdf, ComponentLink10URL=https://datasheet.ciiva.com/26841/ft232rl-reel-26841080.pdf, Data Rate=12Mbps, DatasheetVersion="ver 2.07, Jul-2010", Height=1.75mm, Interface=RS-232,RS-422,RS-485,UART, Lead Free="Lead Free", Length=10.2mm, Mount="Surface Mount", Number of Channels=1, Number of Pins=28, Number of Transceivers=1, PackageDescription="28-Pin Small Outline Package 0.65 mm Pitch", PackageReference=SSOP-28, PackageVersion=2010, Packaging="Tape and Reel", Pricing 1="1=4.5, 10=4.05, 100=3.65, 250=3.25, 500=2.85002, 1000=2.65 (USD)", Published=19-Aug-2010, Publisher="Altium Limited", Radiation Hardening=No, REACH SVHC="No SVHC", Stock 1=216496, Supplier 1=Digi-Key, Supplier 2=Digi-Key, Weight=0.080001oz, Width=5.3mm
Y1 Y2: Capacitance=15pF, Case/Package=SMD/SMT, Frequency=16MHz, Frequency Stability=0.15%, Frequency Tolerance=0.5%, Manufacturer=Murata, Manufacturer Part Number=CSTCE16M0V53C-R0, Max Operating Temperature=125°C, Min Operating Temperature=-40°C, Package Quantity=3000, Supplier Part Number=490-17948-1-ND, ComponentLink1Description=https://datasheet.ciiva.com/16430/cstce16m0v53c-r0-16430704.pdf, ComponentLink1URL=https://datasheet.ciiva.com/16430/cstce16m0v53c-r0-16430704.pdf, ComponentLink2Description=https://datasheet.ciiva.com/14132/ceralock-eng-bro-14132709.pdf, ComponentLink2URL=https://datasheet.ciiva.com/14132/ceralock-eng-bro-14132709.pdf, ComponentLink3Description=https://datasheet.ciiva.com/29617/l0430e-29617948.pdf, ComponentLink3URL=https://datasheet.ciiva.com/29617/l0430e-29617948.pdf, ComponentLink4Description=https://datasheet.ciiva.com/29617/l0430e-29617949.pdf, ComponentLink4URL=https://datasheet.ciiva.com/29617/l0430e-29617949.pdf, ComponentLink5Description=https://datasheet.ciiva.com/29617/l0430e-29617950.pdf, ComponentLink5URL=https://datasheet.ciiva.com/29617/l0430e-29617950.pdf, ComponentLink6Description=https://datasheet.ciiva.com/26812/getdatasheetpartid-418508-26812063.pdf, ComponentLink6URL=https://datasheet.ciiva.com/26812/getdatasheetpartid-418508-26812063.pdf, Composition=Ceramic, Contact Plating=Gold, Height=0.031inch, Lead Free="Lead Free", Length=0.126inch, Mount="Surface Mount", Number of Pins=3, Packaging="Tape and Reel", REACH SVHC="No SVHC", Stock 1=0, Supplier 1=Digi-Key, Termination=SMD/SMT, Tolerance=0.5%, Width=0.051inch

## Via types
v1: diameter 0.5, hole 0.3, Top Layer to Bottom Layer, tented both sides, 240 vias
v2: diameter 5.5, hole 3.3, Top Layer to Bottom Layer, 4 vias
v3: diameter 1.27, hole 0.711, Top Layer to Bottom Layer, tented both sides, 1 vias

## Nets (pads, with @x,y where several pads share a name; then routed paths per layer and width w, separated by ;. In a path a pad name is that pad's centre, name@x,y a point inside that pad or via, vN(x,y) a via of type N, cw(c..) or ccw(c..) an arc to the next point about the centre after c; other vN are vias at no path point)
+3.3V: C15.2 U9.17 | length 4.3
  Top Layer w0.254: v1(40.513,42.164) 40.549,42.2 41.518,42.2 42.1,41.618 C15.2@42.1,41.4
  Bottom Layer w0.254: U9.17 40.125,41.725 40.513,42.113 v1(40.513,42.164)
+5V: C7.2 C8.1 C9.2 C12.2 C14.2 D2.1 D4.2 D6.1 D7.1 P2.4 R8.1 R14.1 R16.2 R17.2 RT2.1 U2.2 U2.4 U5.18 U6.4 U6.6 U6.18 U8.3 U9.4 U9.20 | length 166
  Top Layer w0.254: v1(25,48.7) 28.7,48.7 32.2,45.2 D6.1@35.8,45.2 ; v1(34.9,45.9) 34.9,45.237 34.937,45.2 ; D6.1@36.4,44.6 D6.1@35.8,45.2 ; v1@38.2,41.5 38.2,42.975 36.425,44.75 D6.1 35.95,45.2 D6.1@35.8,45.2
  Top Layer w0.6: v1(6,25) 6,24.988 8.408,22.58 C12.2 ; U2.2@7.8,31.3 7.7,31.2 v1(6,31.2) 6,35.775 7.875,37.65 D2.1 7.925,37.65 8.475,37.1 8.475,37.075 8.45,37.05 v1(9.6,35.9) ; v1(12.8,31.3) U2.4@14.1,31.3 ; U2.4@14.7,31.5 14.7,31.026 U2.4@14.426,31.3 ; v1(15.85,36.347) 15.85,35.712 14.2,34.063 14.2,31.7 14.6,31.3 U2.4@14.426,31.3 ; P2.4@17.6,27.7 P2.4@17.3,28 ; v1(26.314,27.229) 25.486,26.4 23.809,26.4 22.174,24.765 19.66,24.765 17.9,26.525 P2.4 P2.4@17.3,28 ; R17.2 28.811,17.9 30.711,16 37.438,16 38.837,17.399 38.837,18.5 ; v1(35.1,26.5) 35.1,23.218 35.839,22.479 v1(37.567,22.479) 37.922,22.479 38.837,21.565 38.837,18.5 ; U8.3@36.2,18.5 38.837,18.5 ; U8.3 U8.3@36.725,18.465 ; D6.1@36.425,44.775 39.275,44.775 D7.1 ; U5.18@37.34,34.2 37.911,34.2 37.923,34.188 39.144,34.159 40.004,33.299 42.469,33.299 C14.2@43.51,34.341 ; R16.2 43.51,31.51 C14.2@43.51,34.341 ; C7.2@43.51,37.541 C14.2@43.51,34.341 ; U2.4@14.1,31.3 14.1,30.8 16.9,28 P2.4@17.3,28 ; U2.4@14.1,31.3 U2.4 U2.4@14.426,31.3 ; U2.4@14.1,31.3 14.1,31.626 U2.4@14.426,31.3
  Bottom Layer w0.254: RT2.1@24.8,52.3 RT2.1 23.876,51.176 23.876,49.708 24.884,48.7 v1(25,48.7) ; v1(34.9,45.9) 34.912,45.912 34.912,47.188 U9.4@34.9,47.2 ; 38.2,38.635 U9.20@38.2,40.1 ; U9.20@38.2,40.8 38.187,40.813 38.187,41.387 v1(38.2,41.4)
  Bottom Layer w0.6: v1(6,25) v1(6,31.2) ; v1(9.6,35.9) 9.6,32.6 10.9,31.3 v1(12.8,31.3) ; v1(15.85,36.347) 16.637,37.135 R8.1@17.323,37.135 ; P2.4@17.9,28.1 P2.4@18,28.1 ; v1(26.314,27.229) 26.486,27.4 U6.18 29.8,27.4 31,28.6 33.4,28.6 33.95,29.15 ; R14.1@34.475,21.1 35.854,22.479 v1(37.567,22.479) 38.079,22.479 39.3,23.7 C8.1@41,23.7 ; v1(35.1,26.5) 35.1,28 34.9,28.2 ; U6.4@36.5,29.8 34.6,29.8 33.95,29.15 ; U6.6 34.9,28.2 ; U6.4 38.055,29.8 39.675,31.42 39.624,31.471 v1(39.624,33.68) 39.624,37.211 38.2,38.635 ; C8.1 C9.2@43.42,23.78 ; C9.2 v1(43.5,25.3) ; 33.95,29.15 34.9,28.2
+12V: C1.2 C2.2 C11.2 C19.1 R2.2 R3.2 U1.2 U1.8 U2.3 U7.4 U7.5 U7.12 | length 80
  Top Layer w0.6: R2.2@2.8,22.4 2.85,22.35 5.25,22.35 v3(5.1,22.3)
  Top Layer w2: R2.2 2.9,23.4 4.3,24.8 4.3,27.7 C2.2 5.6,29 8.1,29 9,29 11.1,31.1 11.1,33.5 14.3,36.7 14.3,41.3 C19.1@17.1,44.1 ; C19.1 17.053,46.314 25.039,54.3 34.2,54.3
  Bottom Layer w0.6: C1.2@4.953,17.253 4.953,22.164 v3@5.004,22.215 ; C1.2 6.02,15.951 11.436,15.951 12.376,16.891 U1.8@12.446,16.891 ; v3@5.004,22.327 5.08,22.327 6.02,21.387 6.02,18.821 6.681,18.16 U1.2 ; U1.8 U1.8@13.411,16.89 ; U1.8@13.2,16.9 13.401,16.9 U1.8@13.411,16.89 ; R3.2 16.8,16.2 14.1,16.2 14.1,16.201 U1.8@13.411,16.89
ADC0: C6.2 R3.1 R5.2 U6.23 | length 30.9
  Bottom Layer w0.6: R5.2 17.1,23.6 ; C6.2@18,23.8 18.1,23.8 18.1,25.5 16.3,27.3 16.3,33.46 17.34,34.5 21.4,34.5 22.615,33.285 25.77,33.285 26.467,32.588 26.467,32.003 27.076,31.394 28.144,31.394 U6.23 ; R3.1 18.1,19.924 17.1,20.924 17.1,23.6 ; C6.2 17.1,23.6
ADC1: C3.2 R1.2 U1.6 U6.24 | length 36.6
  Top Layer w0.6: C3.2 12.8,22.4 13.82,22.4 14.884,21.336 v1(14.884,20.193)
  Bottom Layer w0.254: U6.24@27.947,32.2 U6.24
  Bottom Layer w0.6: U1.6 13.385,19.43 14.516,20.561 ; 14.453,20.574 14.503,20.574 14.516,20.561 ; R1.2@16.078,19.533 15.545,19.533 v1(14.884,20.193) 14.516,20.561 ; 27.267,32.88 U6.24@27.947,32.2 ; 27.267,32.881 26.063,34.085 22.946,34.085 21.731,35.3 17.009,35.3 15.5,33.791 15.5,28.5 14.503,27.503 14.503,20.625 14.541,20.587 14.516,20.561
ADC2: C13.2 R4.2 RT2.2 U6.25 | length 25.9
  Bottom Layer w0.254: RT2.2 C13.2 R4.2
  Bottom Layer w0.6: RT2.2@22.7,52.2 RT2.2 22.8,48.897 26.049,45.649 26.049,38.736 ; 26.1,38.7 26.1,37.486 28.143,35.443 28.207,35.443 29.6,34.05 U6.25
ADC3: U6.26
ADC4: R7.2 U6.27 | length 24.6
  Top Layer w0.254: v1(21.463,25.908) 22.7,27.145 22.7,33.369 24.409,35.077 v1(30.683,35.077)
  Bottom Layer w0.254: v1(21.463,25.908) 21.438,25.883 21.438,23.825 22.987,22.276 R7.2@22.987,20.062 ; v1(30.683,35.077) 31.15,34.611 U6.27@31.15,34
  Bottom Layer w0.6: R7.2@22.8,20.1 R7.2@22.9,20 ; R7.2 R7.2@22.987,20.062
ADC5: R6.2 U6.28 | length 28.2
  Top Layer w0.254: v1(20.752,25.959) 20.752,26.01 21.9,27.158 21.9,33.7 24.4,36.2 v1(31,36.2)
  Bottom Layer w0.254: R6.2 R6.2@20.775,20.1 ; v1(20.752,25.959) 20.752,25.652 20.396,25.296 20.396,19.721 R6.2@20.886,20.211 ; v1(31,36.2) 32,35.2 U6.28@32,34.2
ADC6: U6.19
ADC7: U6.22
CANH: P1.3 P1.7 P3.1 R15.1 U8.7 | length 38.8
  Top Layer w0.6: P1.7@28,8.5 P1.7@28.131,8.5 ; P1.3 28.131,12.587 29.337,13.792 41.25,13.792 42.542,12.5 46.8,12.5 P3.1 48.4,14.1 48.4,18 R15.1@48.6,18.2 ; P1.3@28.143,11.887 28.131,11.875 P1.7@28.131,8.5 ; P1.7@28.166,8.5 P1.7@28.131,8.5 ; P1.7@28.5,8.4 28.435,8.465 P1.7 P1.7@28.131,8.5 ; U8.7@41.8,19.7 46.467,19.7 47.683,18.484 R15.1@48.6,18.484 ; R15.1@48.392,18.913 R15.1@48.617,18.688 ; R15.1@48.6,18.575 R15.1@48.6,18.484 ; R15.1@48.616,18.491 48.608,18.484 R15.1@48.6,18.484 ; R15.1 R15.1@48.617,18.597
CANL: P1.2 P1.6 P3.2 R15.2 U8.6 | length 35.8
  Top Layer w0.6: P1.6 P1.2 24.631,13.735 25.502,14.605 41.732,14.605 42.437,13.9 ; U8.6@41.1,18.4 R15.2@45.6,18.4 ; 42.443,13.894 42.437,13.9 ; R15.2@45.58,18.08 R15.2@45.6,18.1 ; R15.2@45.6,18.2 R15.2@45.63,18.17 ; P3.2@45.7,13.9 42.437,13.9 ; P3.2@45.701,13.928 45.661,13.929 45.63,13.93 45.63,17.83 R15.2@45.8,18
D0/RXD: P5.1 R9.1 U6.30 | length 12.5
  Top Layer w0.6: R9.1@27.7,41.7 27.76,41.64 P5.1
  Bottom Layer w0.254: P5.1@27.9,39.4 P5.1@28.448,38.852
  Bottom Layer w0.6: P5.1@27.8,39.4 27.8,39.36 29.16,38 31.291,38 33.6,35.691 U6.30
D1/TXD: P5.2 R10.1 U6.31 | length 10.5
  Top Layer w0.6: P5.2 30.5,39.6 R10.1@30.5,41.8
  Bottom Layer w0.254: P5.2@30.5,39.618 P5.2@30.5,39.7
  Bottom Layer w0.6: P5.2@30.2,39.4 30.43,39.17 31.213,39.17 34.4,35.983 U6.31
D2/INTCAN: U5.12 U6.32 | length 10.6
  Top Layer w0.254: U5.12 38.117,26.56 38.43,26.873 v1(38.43,32.106)
  Bottom Layer w0.254: U6.32@35.2,33.7 36.683,33.7 38.278,32.106 v1(38.43,32.106)
D3: U6.1
D4: U6.2 U7.3 | length 37.3
  Top Layer w0.6: U7.3 32.195,50.9 32.2,50.9 32.2,49.8 33.55,48.45 42.982,48.45 44.145,47.287 44.145,40.056 43.053,38.964 38.864,38.964 35.077,35.177 v1(35.077,32.41)
  Bottom Layer w0.6: v1(35.077,32.41) 35.077,32.065 35.743,31.4 U6.2@36.1,31.4
D5: U6.9 U7.6 | length 39.7
  Top Layer w0.6: U7.6@36,50.8 36,49.7 36.45,49.25 43.313,49.25 44.983,47.58 44.983,30.683 43.6,29.3 42.3,29.3 v1(38.7,25.7)
  Bottom Layer w0.6: U6.9@35.25,25.6 35.3,25.6 35.396,25.696 36.696,25.696 v1@38.7,25.696
D6: U6.10 U7.11 | length 61.3
  Top Layer w0.6: U7.11@36,57.1 36.03,57.13 36.03,58.349 37.181,59.5 48.602,59.5 50.8,57.302 50.8,51.1 46,46.3 46,30.3 44.1,28.4 43,28.4 v1(39.3,24.7)
  Bottom Layer w0.6: U6.10@34.4,24.7 34.4,24.2 34.699,23.901 37.084,23.901 37.883,24.7 v1(39.3,24.7)
D7: U6.11
D8: U6.12
D9/CS: U5.16 U6.13 | length 9.4
  Top Layer w0.254: v1(32.004,26.924) 32.004,27.604 36.04,31.64 U5.16
  Bottom Layer w0.254: U6.13@32,25 U6.13@32.123,24.877 ; U6.13 32.004,25.154 v1(32.004,26.924)
D10: U6.14
D11/MOSI: P2.5 U5.14 U6.15 | length 30
  Top Layer w0.254: v1(28.9,22.6) v1(30.4,24.1) ; v1(33.4,23.8) 33.7,24.1 33.7,27.9 34.9,29.1 U5.14
  Bottom Layer w0.254: P2.5@18,30.5 18,30.4 19.101,29.299 19.101,27.099 19.7,26.5 22,26.5 25.9,22.6 v1(28.9,22.6) ; U6.15@30.277,25.077 U6.15@30.3,25.1 ; U6.15@30.277,25.273 U6.15 ; U6.15@30.4,25 v1(30.4,24.1) 30.7,23.8 v1(33.4,23.8)
D12/MISO: P2.1 U5.15 U6.16 | length 24.7
  Top Layer w0.254: v1(32.233,23.241) 32.817,23.825 32.817,27.717 35.5,30.4 37.045,30.4 U5.15
  Bottom Layer w0.254: P2.1@20.4,28.1 20.4,28.04 P2.1 20.44,27.86 20.58,28 21.8,28 24.6,25.2 29.7,25.2 29.65,25.15 U6.16 ; U6.16@29.6,24.8 29.6,23.97 30.329,23.241 v1(32.233,23.241)
D13/SCK: P2.2 R11.2 U5.13 U6.17 | length 19.1
  Top Layer w0.254: v1(34.3,27.6) 34.367,27.6 34.605,27.838 36.881,27.838 U5.13@36.906,27.864
  Bottom Layer w0.254: P2.2@20.4,30.6 20.4,30.58 P2.2 P2.2@20.44,30.46 ; R11.2@24.7,27.6 25.1,27.6 26.2,26.5 28.05,26.5 U6.17 ; U6.17@28.1,26.6 30.1,26.6 31.1,27.6 v1(34.3,27.6)
  Bottom Layer w0.6: P2.2@20.4,30.5 20.44,30.46 20.59,30.31 21.515,30.31 24.225,27.6 R11.2 ; R11.2@24.65,27.55 R11.2@24.825,27.375
GND: C1.1 C2.1 C3.1 C4.1 C5.1 C6.1 C7.1 C8.2 C9.1 C10.1 C11.1 C12.1 C13.1 C14.1 C15.1 C17.1 C18.1 C19.2 D1.2 P1.4 P1.8 P2.6 P4.5 R1.1 R4.1 R5.1 R12.2 R13.1 S1.2 U1.3 U1.4 U1.5 U2.1 U3.4 U4.4 U5.9 U6.3 U6.5 U6.21 U7.1 U7.8 U7.9 U7.16 U8.2 U9.7 U9.18 U9.21 U9.25 U9.26 Y1.2 Y2.2 | length 8.9
  Top Layer w0.254: U7.1@29.523,51.435 29.655,51.567 U7.1 ; U7.16@29.54,56.845 29.489,56.896 U7.16@29.54,56.896
  Bottom Layer w0.6: U6.21 32.492,29.8 33.292,30.6 U6.3@36.2,30.6
  other v1: 8,5 11,5 14,5 17,5 20,5 23,5 26,5 29,5 32,5 35,5 38,5 41,5 44,5 47,5 6.5,8 9.5,8 18.5,8 33.5,8 42.5,8 45.5,8 2,11 5,11 8,11 11,11 17,11 23,11 26,11 35,11 44,11 47,11 50,11 3.5,14 6.5,14 9.5,14 12.5,14 21.5,14 51.5,14 2,17 11,17 44,17 50,17 9.5,20 37.795,19.99 51.5,20 11,23 50,23 15.5,26 14,29 3.5,32 51.5,32 2,35 5,35 8,35 38,35 6.5,38 9.5,38 24.5,38 36.5,38 42.5,38 51.5,38 5,41 17,41 20,41 23,41 29,41 32,41 47,41 50,41 6.5,44 9.5,44 12.5,44 21.5,44 24.5,44 11,47 20,47 25,48 26,48 27,48 28,48 46,48 29.5,49 30.5,49 31.5,49 45.5,49 46.5,49 47.5,49 12.5,50 15.5,50 44,50 45,50 46,50 47,50 48,50 44.5,51 45.5,51 46.5,51 47.5,51 48.5,51 49.5,51 19,52 20,52 26,52 27,52 28,52 40,52 41,52 42,52 43,52 44,52 49,52 50,52 19.5,53 20.5,53 21.5,53 49.5,53 19,54 20,54 21,54 49,54 50,54 19.5,55 20.5,55 21.5,55 49.5,55 19,56 20,56 21,56 50,56 19.5,57 20.5,57 21.5,57 26.5,57 27.5,57 28.5,57 39.5,57 40.5,57 41.5,57 42.5,57 43.5,57 44.5,57 45.5,57 46.5,57 47.5,57 48.5,57 49.5,57 20,58 21,58 22,58 23,58 24,58 32,58 33,58 44,58 45,58 46,58 47,58 48,58 49,58
NetC4_2: C4.2 U4.1 | length 5.7
  Bottom Layer w0.6: U4.1@31.6,20.9 31.62,20.88 31.988,20.88 32.893,19.975 35.115,19.975 36.08,20.94 C4.2
NetC5_2: C5.2 U4.2 | length 9.8
  Bottom Layer w0.6: U4.2@30.722,19.6 U4.2@31.2,19.6 ; U4.2@31.4,19.6 32.137,19.6 32.562,19.175 38.479,19.175 39.1,19.796 C5.2
NetC10_2: C10.2 U6.20 | length 5.5
  Bottom Layer w0.254: C10.2@24.8,32.3 C10.2@24.98,32.3
  Bottom Layer w0.6: C10.2@24.9,32.2 25.08,32.2 25.58,31.7 25.632,31.7 26,31.332 26,29.9 26.85,29.05 U6.20@28.1,29.05
NetC16_1: C16.1 U9.2 | length 5.5
  Top Layer w0.254: v1(33.579,43.129) 33.604,43.104 33.604,41.704 C16.1@33.6,41.7
  Bottom Layer w0.254: v1(33.579,43.129) 33.579,47.104 U9.2
NetD1_1: D1.1 R11.1 | length 0.3
  Top Layer w0.6: D1.1 v1(24.6,30.6)
NetD2_2: D2.2 R12.1 | length 3.2
  Top Layer w0.6: D2.2 8.25,40.3 R12.1@11,40.3
NetD3_1: D3.1 R14.2 | length 0.2
  Top Layer w0.6: D3.1@33.8,17.7 D3.1@33.8,17.9
  other v1: 33.8,18
NetD3_2: D3.2 U5.1 U8.1 | length 19.7
  Top Layer w0.254: U5.1 28.325,34.18 31.471,31.034 31.471,22.962 33.7,20.732 D3.2@33.7,20.6
  Top Layer w0.6: D3.2@33.8,20 D3.2@34.35,20.55 ; D3.2@33.9,20.9 33.98,20.98 36.263,20.98 U8.1 ; U8.1@35.846,21 U8.1@35.9,21
NetD5_1: D5.1 R17.1 | length 2.7
  Top Layer w0.6: R17.1 28.75,20.75 31.15,20.75 D5.1@31.2,20.8
NetD5_2: D5.2 U5.2 U8.4 | length 22.2
  Top Layer w0.254: U5.2 28.325,32.91 31.064,30.171 31.064,22.778 32.202,21.64 32.202,19.477 31.55,18.825 D5.2@31.55,18.75